# EAGLE board lock-board_antenna_v3 (EAGLE 7.6.0)
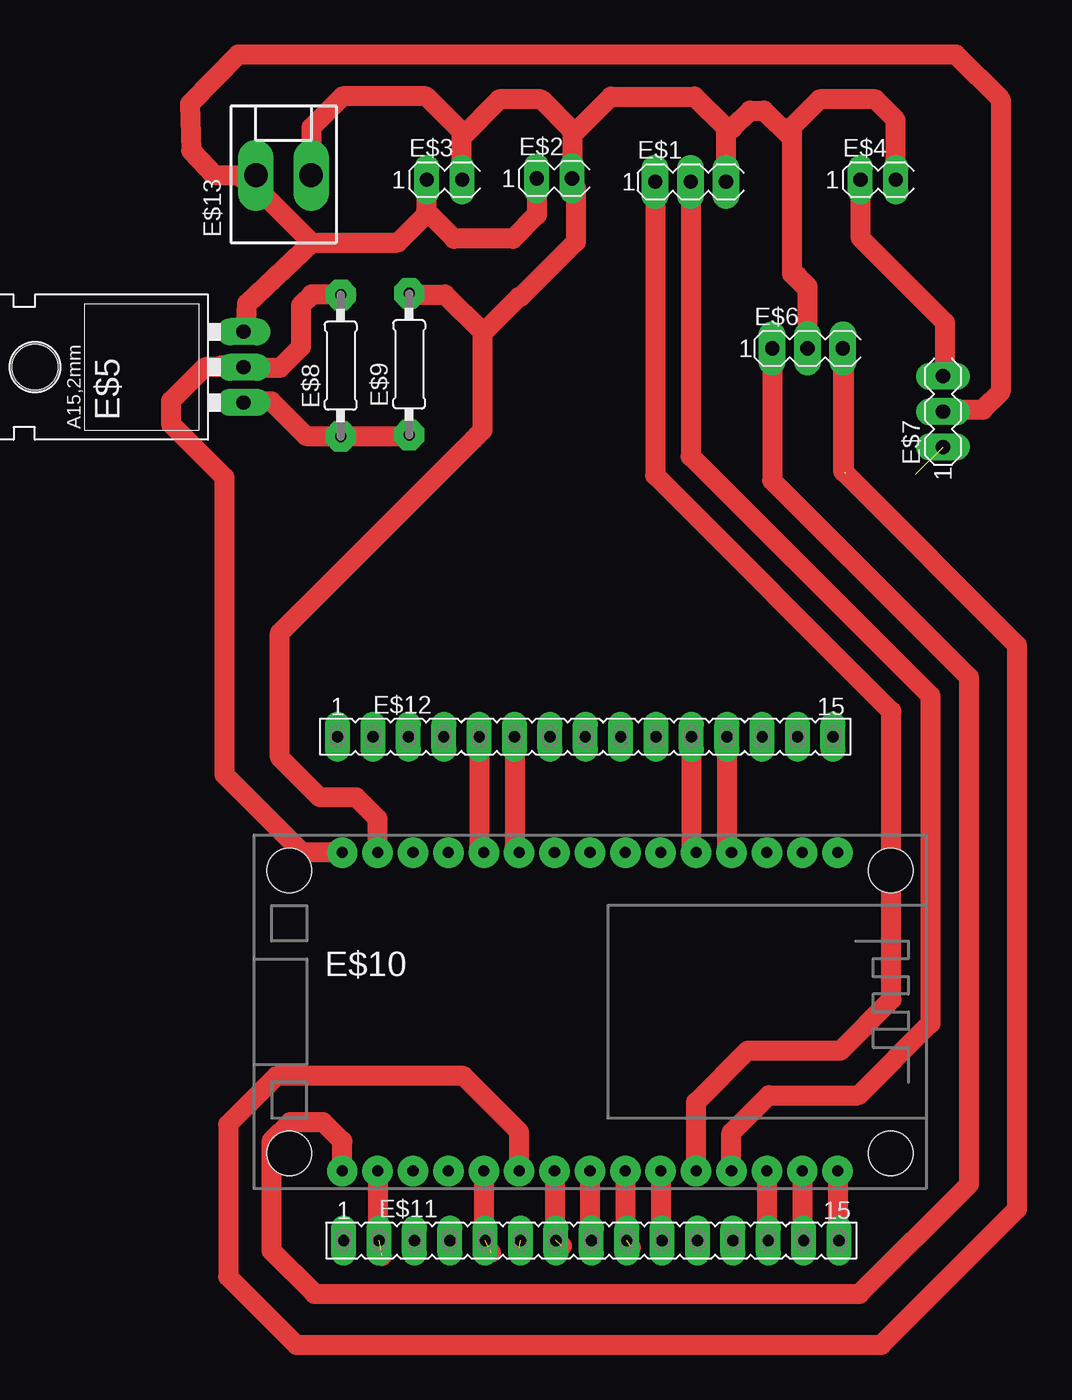
[diagram p0: board, top side]
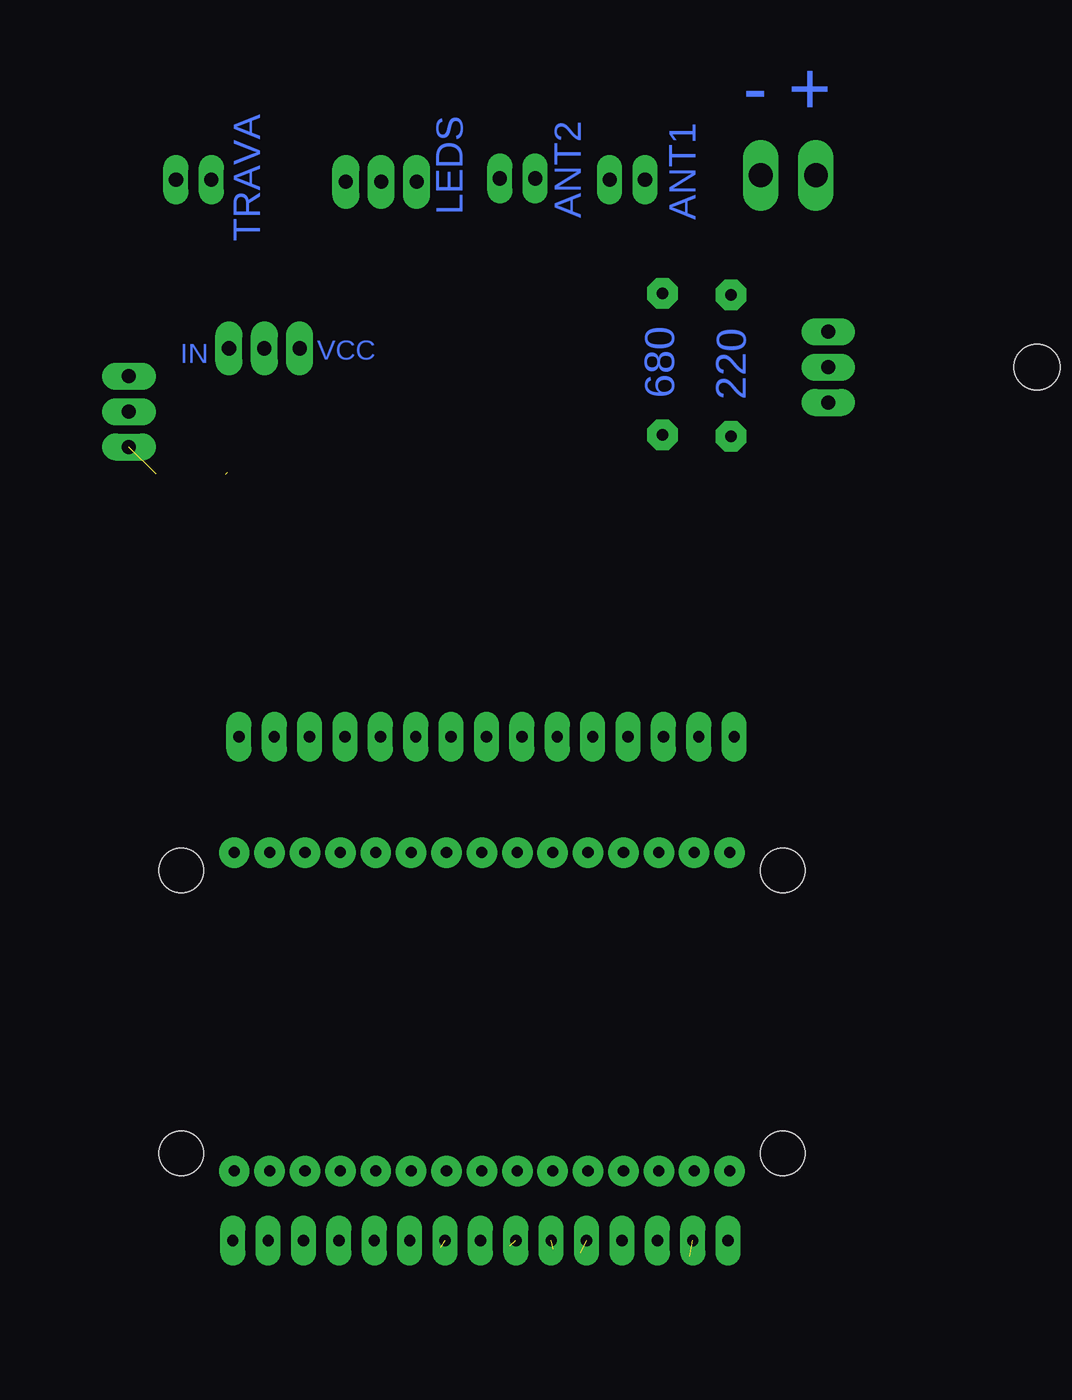
[diagram p1: board, bottom side, seen from below]

No outline drawn. Coordinates in mm, seen from the top.
Copper layers (1*16): Top 0.035mm / dielectric 1.5mm / Bottom 0.035mm
Design rules "default": minimum track width 10mil, minimum drill 24mil, track to track 8mil, track to pad 8mil, pad to pad 8mil, via to via 8mil, smd to smd 8mil, copper to edge 40mil, drill to drill 8mil, minimum pad ring 10mil, minimum via ring 8mil, stop-mask expansion 4mil, vias tented up to drill 0mil, thermal gap 10mil
Net classes: 0 default: clearance 0.205 mm

## Footprints (pad centres in the part's own frame; a part is rotated, then mirrored left to right if it is on the bottom)
MA04-1 = drill 1.016 pad 1.93 long: 1 -3.81,0; 2 -1.27,0; 3 1.27,0
MA03-1 = drill 1.016 pad 1.778 long: 1 -2.54,0; 2 0,0
317TL = drill 1.016 pad 1.93 long: 1 -2.54,-3.81; 2 0,-3.81; 3 2.54,-3.81 | hole 3.302: 0,11.176
0207/10 = drill 0.813 pad 2.184 octagon: 1 -5.08,0; 2 5.08,0
ESP12E_DEVKIT = drill 0.8 pad 2.184: 3V3@0 -11.43,-7.62; 3V3@1 11.43,5.08; 3V3@2 11.43,-17.78; AD0 -11.43,17.78; CLK -11.43,-2.54; CMD -11.43,2.54; D0 11.43,17.78; D1 11.43,15.24; D2 11.43,12.7; D3 11.43,10.16; D4 11.43,7.62; D5 11.43,0; D6 11.43,-2.54; D7 11.43,-5.08; D8 11.43,-7.62; EN -11.43,-10.16; GND@0 -11.43,-5.08; GND@1 -11.43,-15.24; GND@2 11.43,2.54; GND@3 11.43,-15.24; RST -11.43,-12.7; RSV@0 -11.43,15.24; RSV@1 -11.43,12.7; RX 11.43,-10.16; SD0 -11.43,0; SD1 -11.43,5.08; SD2 -11.43,7.62; SD3 -11.43,10.16; TX 11.43,-12.7; VIN -11.43,-17.78 | hole 3.2: -10.16,21.59; 10.16,21.59; 10.16,-21.59; -10.16,-21.59
FE15 = drill 0.813 pad 1.778 long: 1 -17.78,0; 2 -15.24,0; 3 -12.7,0; 4 -10.16,0; 5 -7.62,0; 6 -5.08,0; 7 -2.54,0; 8 0,0; 9 2.54,0; 10 5.08,0; 11 7.62,0; 12 10.16,0; 13 12.7,0; 14 15.24,0; 15 17.78,0
KK-156-2 = drill 1.7 pad 2.184 long: 1 -1.98,0; 2 1.98,0

## Placement (x,y rotation side)
E$1  [MA04-1]  327,-16.11 0 top
E$2  [MA03-1]  317.21,-15.87 0 top
E$3  [MA03-1]  309.33,-15.96 0 top
E$4  [MA03-1]  340.46,-15.96 0 top
E$5  [317TL]  289.83,-29.43 90 top
E$6  [MA04-1]  335.39,-28.08 0 top
E$7  [MA04-1]  343.85,-31.35 90 top
E$8  [0207/10]  300.61,-29.32 90 top
E$9  [0207/10]  305.53,-29.21 90 top
E$10  [ESP12E_DEVKIT]  318.5,-75.72 270 top
E$11  [FE15]  318.61,-92.14 0 top
E$12  [FE15]  318.17,-55.96 0 top
E$13  [KK-156-2]  296.51,-15.64 0 top

## Library data of the parts
E$1-E$4 E$6 E$7 = con-lstb
E$5 = v-reg
E$8 E$9 = eagle-ltspice
E$10 = ESP12E_DEVKIT
E$11 E$12 = con-lsta
E$13 = con-molex

## Nets
S$1: E$5.2 E$10.VIN
S$2: E$2.2
S$3: E$10.GND@1
S$4: E$6.1 E$10.3V3@2
S$5: E$1.2 E$10.D3
S$6: E$1.1 E$10.D4
S$7: E$10.GND@3 E$11.2
S$8: E$10.D8 E$11.5
S$10: E$10.D6 E$11.7
S$11: E$10.D5 E$11.8
S$12: E$10.GND@2 E$11.9
S$13: E$10.3V3@1 E$11.10
S$14: E$10.D2 E$11.13
S$15: E$10.D1 E$11.14
S$16: E$10.D0 E$11.15
S$17: E$10.3V3@0 E$12.5
S$18: E$10.GND@0 E$12.6
S$19: E$10.SD3 E$12.12
S$20: E$10.SD2 E$12.11
S$21: E$6.2
S$22: E$11.6
S$23: E$6.3 E$10.D7
S$24: E$7.1

## Tracks (layer width: path | path; a pad name or v marks a point on that pad's centre or on a via)
S$1
  Top 1.422: E$5.2 290.86,-29.43 288.42,-31.86 288.42,-33.49 292.27,-37.34 292.27,-58.7 297.86,-64.29 E$10.VIN
S$3
  Top 1.422: E$10.GND@1 303.26,-61.87 301.71,-60.32 299.11,-60.32 296.25,-57.46 296.25,-48.51 310.41,-34.35
S$4
  Top 1.422: E$6.1 331.58,-37.56 345.73,-51.7 345.73,-88.1 337.85,-95.98 298.73,-95.98 295.63,-92.87 295.63,-84.99 296.97,-83.64 299.35,-83.64 300.72,-85.01 E$10.3V3@2
S$5
  Top 1.422: E$1.2 325.73,-35.82 342.94,-53.02 342.94,-76.57 337.79,-81.72 331.35,-81.72 328.66,-84.4 E$10.D3
S$6
  Top 1.422: E$10.D4 326.12,-82.21 329.84,-78.49 336.49,-78.49 340.15,-74.84 340.15,-54.14 323.19,-37.18 E$1.1
S$7  (1 unrouted)
  Top 1.422: E$10.GND@3 303.26,-92.96 303.58,-93.27
S$8  (1 unrouted)
  Top 1.422: E$10.D8 310.88,-92.5 311.4,-93.02
S$10  (1 unrouted)
  Top 1.422: E$10.D6 315.96,-91.99 316.49,-92.53
S$11
  Top 1.422: E$10.D5 318.5,-92.04 E$11.8
S$12  (1 unrouted)
  Top 1.422: E$10.GND@2 321.04,-92.23 321.46,-92.65
S$13
  Top 1.422: E$10.3V3@1 323.58,-92.04 E$11.10
S$14
  Top 1.422: E$10.D2 331.2,-92.04 E$11.13
S$15
  Top 1.422: E$10.D1 333.74,-92.04 E$11.14
S$16
  Top 1.422: E$10.D0 336.28,-92.04 E$11.15
S$17
  Top 1.422: E$12.5 310.55,-63.96 E$10.3V3@0
S$18
  Top 1.422: E$12.6 313.09,-63.96 E$10.GND@0
S$19
  Top 1.422: E$12.12 328.33,-63.96 E$10.SD3
S$20
  Top 1.422: E$12.11 325.79,-63.96 E$10.SD2
S$21
  Top 1.422: E$6.2 334.12,-23.62 333.39,-22.88
S$22  (1 unrouted)
  Top 1.422: 313.42,-92.74 313.39,-92.78
S$23  (1 unrouted)
  Top 1.422: E$10.D7 313.42,-84.35 309.41,-80.34 296,-80.34 292.52,-83.82 292.52,-94.74 297.42,-99.64 339.42,-99.64 349.18,-89.88 349.18,-49.4 336.74,-36.97 | 336.74,-36.97 336.74,-27.63 336.87,-27.51 | E$6.3 336.66,-36.88 336.74,-36.97
S$24  (1 unrouted)
S$61
  Top 1.422: 293.8,-31.87 295.64,-31.87 298.13,-34.36 305.51,-34.36
S$62
  Top 1.422: 293.8,-26.79 293.89,-24.86 298.53,-20.48 | 298.53,-20.48 294.25,-16.2 293.48,-15.83 294.62,-15.63 291.54,-15.63 289.87,-13.87 289.79,-10.53 293.25,-6.98 344.77,-6.98 347.99,-10.2 347.99,-31.2 346.71,-32.48 344.25,-32.48 | 306.75,-15.98 306.75,-18.2 | 306.75,-18.2 306.75,-18.44 304.71,-20.48 298.53,-20.48 | 314.7,-15.98 314.7,-18.49 312.99,-20.2 308.75,-20.2 306.75,-18.2
S$63
  Top 1.422: 337.91,-15.98 337.91,-20.12 343.99,-26.2 343.99,-29.68 344.25,-29.94
S$67
  Top 1.422: 301.01,-24.2 298.53,-24.2 297.75,-24.98 297.75,-27.98 296.25,-29.48 293.95,-29.48 293.8,-29.33 291.9,-29.33
S$68
  Top 1.422: 340.45,-15.98 340.45,-11.66 338.99,-10.2 334.99,-10.2 332.99,-12.2 332.99,-13 | 332.99,-13 332.99,-22.72 333.98,-23.71 | 298.5,-15.83 298.5,-12.22 300.75,-9.98 306.75,-9.98 309.29,-12.52 309.29,-12.9 | 309.29,-15.98 309.29,-12.9 | 309.29,-12.9 311.99,-10.2 314.99,-10.2 317.24,-12.45 317.24,-12.76 | 317.24,-12.76 320,-10 326,-10 328.27,-12.27 | 328.27,-16 328.27,-12.27 | 328.27,-12.27 328.73,-12.27 330,-11 330.99,-11 332.99,-13 | 305.51,-24.2 308.1,-24.2 310.78,-26.88 310.78,-27.01 | 310.78,-27.01 310.78,-33.98 310.16,-34.6 | 317.24,-12.76 317.24,-16.31 317.49,-16.55 317.49,-20.42 313.51,-24.39 313.39,-24.39 310.78,-27.01

## Text on the board
Bottom: - + | LEDS | ANT1 | ANT2 | TRAVA | VCC | IN | 220 | 680